# Altium PCB ECEN3730_brd_a_09-06-2023.PcbDoc
Units mil, origin at the board's own origin, x right, y up, seen from the top; angles counter-clockwise.
Board outline 3500 x 2000 mil, 2 copper layers (Top Layer, Bottom Layer), stack 61.756 mil thick; 23 components, 13 nets, 59 pads, 14 vias.
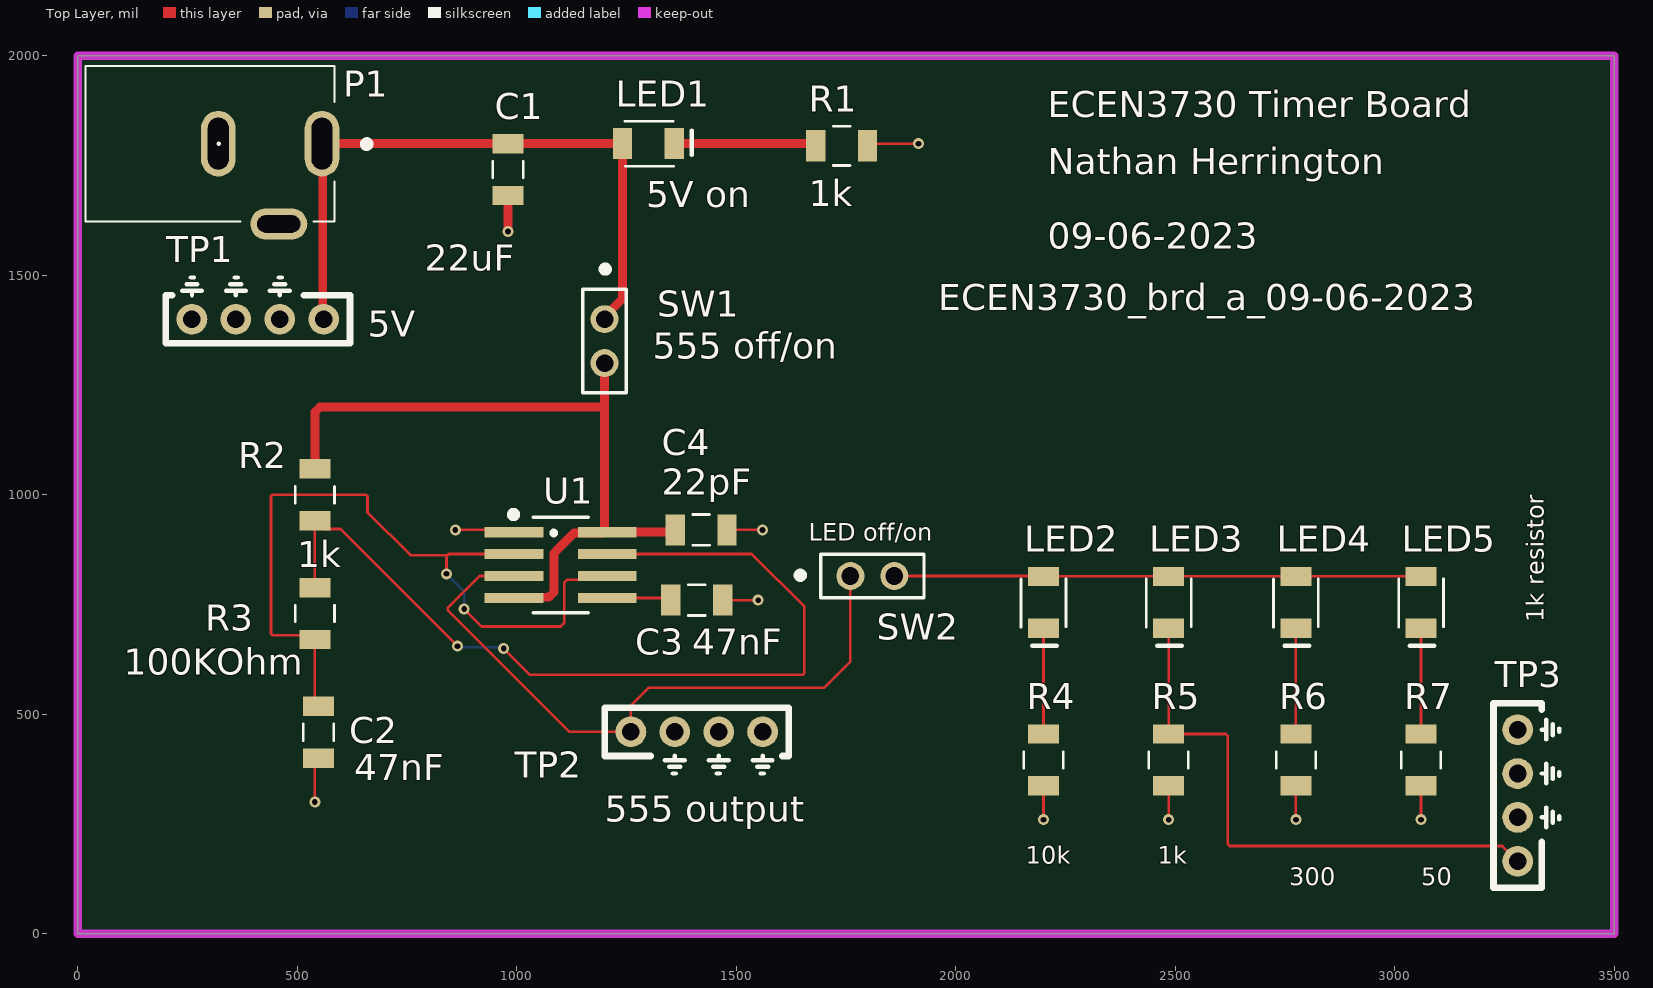
[diagram p0: Top Layer view]
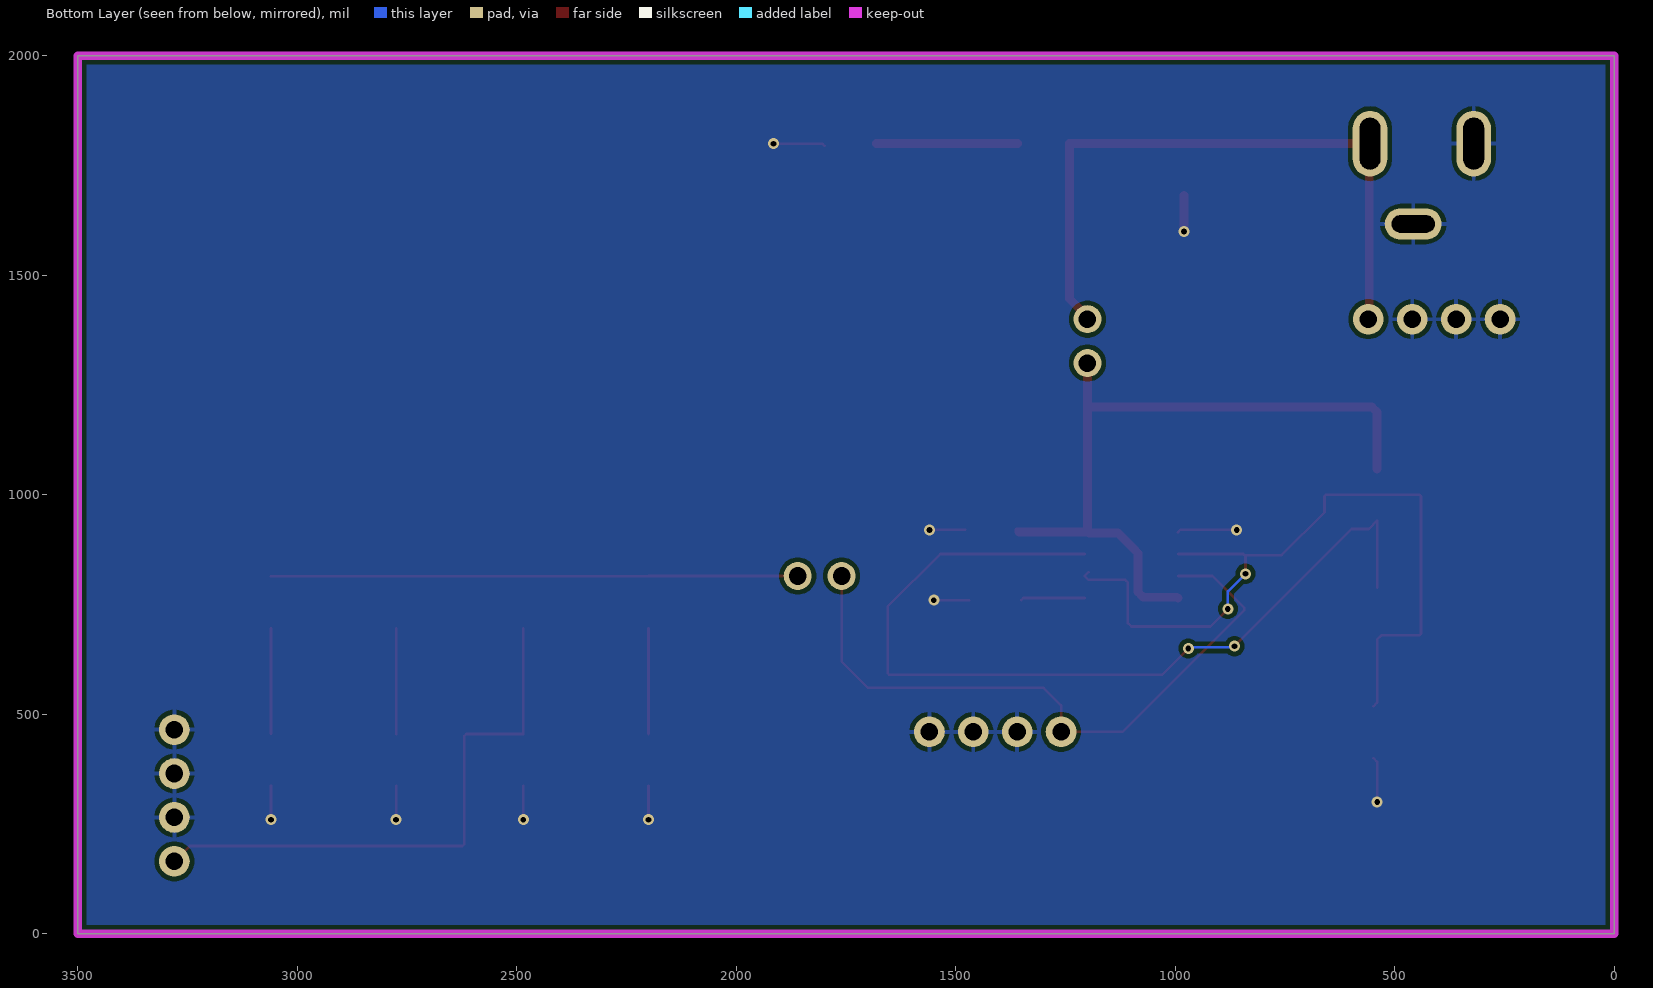
[diagram p1: Bottom Layer view, seen from below]
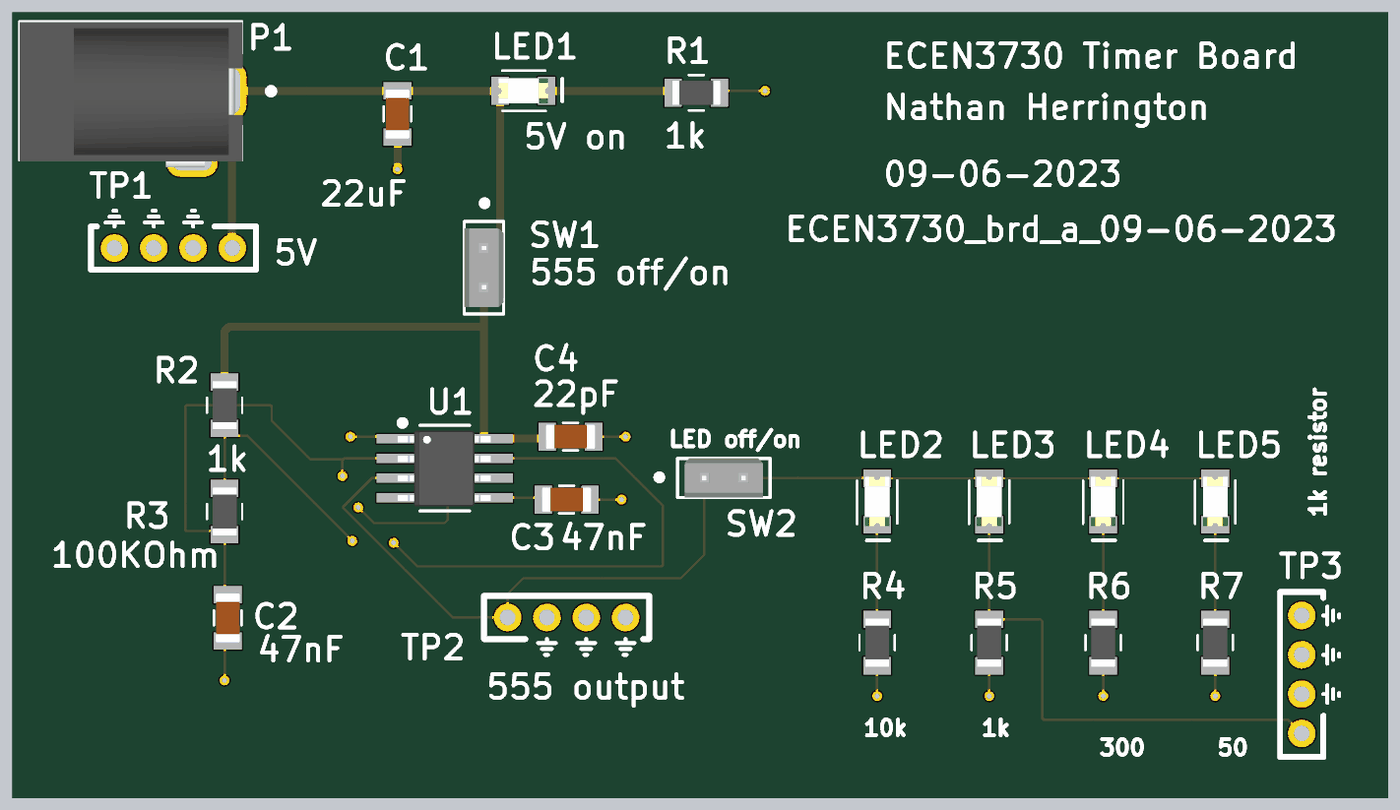
[diagram p2: 3D render of the assembled board from above, using the file's embedded part models]

## Layer stack, top to bottom
Top Solder: solder mask 1, SM-001, Dk 4
Top Layer: signal copper 1.378
Dielectric 1: core 59, Core-043, Dk 4.3
Bottom Layer: signal copper 1.378
Bottom Solder: solder mask 1, SM-001, Dk 4

## Board outline
0,0 3500,0 3500,2000 0,2000

## Design rules (kind name [scope] priority, off if disabled: settings)
BoardOutlineClearance [All] p1: gap=10 ignorepadtopadclearanceinfootprint=FALSE except(0: Arc-SplitContinuation Track-SplitContinuation SMDPad-SplitContinuation THPad-SplitContinuation Via-SplitContinuation Fill-SplitContinuation Poly-SplitContinuation Region-SplitContinuation Text-SplitContinuation)
Clearance [All] p1: gap=10 ignorepadtopadclearanceinfootprint=FALSE except(0: Arc-Hole Track-Hole SMDPad-Hole THPad-Hole Via-Hole Fill-Hole Poly-Hole Region-Hole Text-Hole)
PlaneClearance [All] p1: clearance=10
PlaneConnect [All] p1: planeconnectstyle=Direct reliefexpansion=20 reliefentries=4 reliefconductorwidth=10 reliefairgap=10
PolygonConnect [All] p1: thpad.connectstyle=Relief thpad.reliefconductorwidth=10 thpad.reliefentries=4 thpad.polygonreliefangle="90 Angle" thpad.airgapwidth=10 smdpad.connectstyle=Direct smdpad.reliefconductorwidth=10 smdpad.reliefentries=4 smdpad.polygonreliefangle="90 Angle" smdpad.airgapwidth=10 via.connectstyle=Direct via.reliefconductorwidth=10 via.reliefentries=4 via.polygonreliefangle="90 Angle" via.airgapwidth=10
RoutingVias [All] p1: holewidth=13 width=25 viastyle="Through Hole" minholewidth=13 minwidth=25 maxholewidth=60 maxwidth=80
SolderMaskExpansion [All] p1: expansion=4 istentingtop=FALSE
UnRoutedNet [All] p1: checkbadconnections=TRUE
Width "Schematic Width Constraint_1" [InNet('+5')] p1: maxlimit=100 minlimit=10 preferedwidth=20 minimp=50.000000 maximp=50.000000 favimp=50.000000
Width "Schematic Width Constraint" [InNet('555_5V')] p2: maxlimit=100 minlimit=10 preferedwidth=20 minimp=50.000000 maximp=50.000000 favimp=50.000000
Width [All] p3: maxlimit=100 minlimit=6 preferedwidth=10 bottomlayer_prefwidth=6 minimp=50.000000 maximp=50.000000 favimp=50.000000
27 further rules are at their usual default settings.

## Components (designator, comment, footprint, x,y, rotation, side; value= is the part's Value field where it differs from the comment)
C1 "22uF" 1206_Passive_Capacitor 980,1741 r90 top
C2 "47nF" 1206_Passive_Capacitor 548.38,459 r90 top
C3 "47nF" 1206_Passive_Capacitor 1410,760 r180 top
C4 "22pF" 1206_Passive_Capacitor 1420,920 r180 top
LED1 "Green" LED_1206 1300,1800 r0 top
LED2 "Red" LED_1206 2200,755 r270 top
LED3 "Red" LED_1206 2485,755 r270 top
LED4 "Red" LED_1206 2775,755 r270 top
LED5 "Red" LED_1206 3060,755 r270 top
P1 "Power Jack" Power_Jack 556.22,1800 r180 top value="CONN PWR JACK 2X5.5MM SOLDER"
R1 "1k" 1206_Passive_Resitor 1740,1795 r180 top value="1K Ohm"
R2 "1k" 1206_Passive_Resitor 540,1000 r90 top value="1K Ohm"
R3 "100KOhm" 1206_Passive_Resitor 540,729.5 r90 top
R4 "10k" 1206_Passive_Resitor 2200,396 r90 top value=10KOhm
R5 "1k" 1206_Passive_Resitor 2485,396 r90 top value="1K Ohm"
R6 "300 Ohm" 1206_Passive_Resitor 2775,396 r90 top value=300Ohm
R7 "47 Ohms" 1206_Passive_Resitor 3060,396 r90 top value=47Ohm
SW1 "SW_2Pin_100mil_Switch" 2Pin-Header-Conn 1200,1400 r270 top
SW2 "SW_2Pin_100mil_Switch" 2Pin-Header-Conn 1760,815 r0 top
TP1 "TP_5V" TP10x_Probe 410,1400 r180 top
TP2 "TP_OUT" TP10x_Probe 1410,460 r0 top
TP3 "TP_LED" TP10x_Probe 3280,315 r90 top
U1 "NE555DR" TS555IDTTR 1100,840 r0 top

## Footprints (in the part's own frame and the unit in brackets; to place one, negate y for a bottom-side part, rotate by r counter-clockwise, add the part's x,y. Pads: shape width x height; smd on the part's side, far side on the other; paste and mask are expansions set on the pad)
2Pin-Header-Conn [mm]
  round 1.62 hole 1.02: 1(0,0) 2(2.54,0)
  silkscreen extent -3.03,-1.27 4.26,1.26, body extent -1.27,-1.27 3.81,1.27, height 8.13
1206_Passive_Capacitor [mil]
  rect 44x71 smd: 1(-59,0) 2(59,0)
  silkscreen extent -19,-35 19,35, body extent -63,-31 63,32, height 50
1206_Passive_Resitor [mil]
  rect 44x71 smd: 1(-59,0) 2(59,0)
  silkscreen extent -19,-45 19,45, body extent -61,-31 61,31, height 26
LED_1206 [mil]
  rect 44x71 smd: 1(-59,0) 2(59,0)
  silkscreen extent -54,-51 99,51, body extent -63,-31 63,31, height 28
Power_Jack [mm]
  oval 2x3.8 hole 1.2 slot 3 at 90 deg: 1(0,0) 2(6,0)
  oval 3.3x1.8 hole 1 slot 2.5 at 0 deg: 3(2.5,4.65)
  silkscreen extent -2.79,-4.5 13.68,4.5, body extent -0.76,-4.45 13.64,4.95, height 11.49
TP10x_Probe [mil] "Small Probs footprint"
  round 70 hole 40: 1(-150,0) 2(-50,0) 2(50,0) 2(150,0)
  silkscreen extent -210,-95 210,55
TS555IDTTR [mm] "IC OSC Single Timer 2.7MHz 8SOIC"
  rect 3.4x0.6 smd: 1(-2.7,1.905) 2(-2.7,0.635) 3(-2.7,-0.635) 4(-2.7,-1.905) 5(2.7,-1.905) 6(2.7,-0.635) 7(2.7,0.635) 8(2.7,1.905)
  silkscreen extent -2.85,-2.77 1.6,3.05, body extent -3.03,-2.48 2.96,2.43, height 1.75

## Part data
C1: library part C_22uF_1206, "22uF ±10% 25V X5R 1206 Multilayer Ceramic Capacitors MLCC - SMD/SMT RoHS", LCSC Part#=C12891, MFR Part #=CL31A226KAHNNNE, Datasheet=https://datasheet.lcsc.com/lcsc/1811031514_Samsung-Electro-Mechanics-CL31A226KAHNNNE_C12891.pdf, Type=basic
C2 C3: library part C_47nF_1206, "47nF ±5% 50V C0G 1206 Multilayer Ceramic Capacitors MLCC - SMD/SMT RoHS", LCSC Part#=C21812, MFR Part #=GRM31M5C1H473JA01L, Datasheet=https://datasheet.lcsc.com/lcsc/1810201313_Murata-Electronics-GRM31M5C1H473JA01L_C21812.pdf, Type=Extended
C4: library part C_22pF_1206, "22pF ±5% 1kV C0G 1206 Multilayer Ceramic Capacitors MLCC - SMD/SMT RoHS", LCSC Part#=C107174, MFR Part #=CC1206JKNPOCBN220, Datasheet=https://datasheet.lcsc.com/lcsc/1810241219_YAGEO-CC1206JKNPOCBN220_C107174.pdf, Type=Extended
LED1: library part LED_GREEN_1206, "Green 513~528nm 1206 Light Emitting Diodes (LED) RoHS", LCSC Part#=C434439, MFR Part #=SZYY1206G, Datasheet=https://datasheet.lcsc.com/lcsc/2006301532_Yongyu-Photoelectric-SZYY1206G_C434439.pdf, Type=Extended
LED2 LED3 LED4 LED5: library part LED_RED_1206, "Red 621~631nm 1206 Light Emitting Diodes (LED) RoHS", LCSC Part#=C93133, MFR Part #=15-21/R6C-FQ1R1B/2T, Datasheet=https://datasheet.lcsc.com/szlcsc/1811151241_Everlight-Elec-15-21-R6C-FQ1R1B-2T_C93133.pdf, Type=Extended
P1: library part "P_Power Jack", "Power Barrel Connector Jack 2.10mm ID (0.083\"), 5.50mm OD (0.217\") Through Hole, Right Angle", LCSC Part#=C136744, MFR Part #=PJ-102A, Digikey Link=https://www.digikey.com/product-detail/en/PJ-102A/CP-102A-ND/275425/?itemSeq=304982367, Type=Extended
R1 R2 R5: library part R_1K_1206, "CHIP RESISTOR - SURFACE MOUNT 1KOHMS ±1% 1/4W 1206 ROHS", LCSC Part#=C4410, MFR Part #=RNCP1206FTD1K00CT, Digikey Link=https://www.digikey.com/product-detail/en/RNCP1206FTD1K00/RNCP1206FTD1K00CT-ND/2240675/?itemSeq=304982373, Type=Basic
R3: library part R_100KOhm_1206, "100kΩ ±1% 0.25W ±100ppm/℃ 1206 Chip Resistor - Surface Mount RoHS", LCSC Part#=C17900, MFR Part #=1206W4F1003T5E, Datasheet=https://datasheet.lcsc.com/lcsc/1810301421_UNI-ROYAL-Uniroyal-Elec-1206W4F1003T5E_C17900.pdf, Type=Basic
R4: library part R_10KOhm_1206, "10 kOhms ±5% 0.25W, 1/4W Chip Resistor 1206 (3216 Metric) Automotive AEC-Q200 Thick Film", LCSC Part#=C17902, MFR Part #=RMCF1206FT10K0, Digikey Link=https://www.digikey.com/en/products/detail/stackpole-electronics-inc/RMCF1206FT10K0/1759669, Type=Basic
R6: library part R_300Ohm_1206, "CHIP RESISTOR - SURFACE MOUNT 300OHMS ±1% 1/4W 1206 ROHS", LCSC Part#=C17887, MFR Part #=1206W4F3000T5E, Datasheet=https://datasheet.lcsc.com/szlcsc/Uniroyal-Elec-1206W4F3000T5E_C17887.pdf, Type=Basic
R7: library part R_47Ohm_1206, "47Ω ±5% 0.25W ±200ppm/℃ 1206 Chip Resistor - Surface Mount RoHS", LCSC Part#=C25384, MFR Part #=1206W4J0470T5E, Datasheet=https://datasheet.lcsc.com/lcsc/1811101020_UNI-ROYAL-Uniroyal-Elec-1206W4J0470T5E_C25384.pdf, Type=Extended
SW1 SW2: "2Pin Header", LCSC Part#=C124375, Type=Extended
TP1 TP2 TP3: library part TP_10x_Probe, "Test Point 300 mil centers"
U1: library part U_555_Slow, "555 Timer SOIC-8_150MIL ROHS 150ns Rise Time", LCSC Part#=C7593, Digikey Link=https://www.digikey.com/product-detail/en/texas-instruments/NE555DR/296-6501-1-ND/372490, MFR Part #=NE555DR, Type=Basic

## Via types
v1: diameter 25, hole 13, Top Layer to Bottom Layer, 14 vias

## Nets (pads, with @x,y where several pads share a name; then routed paths per layer and width w, separated by ;. In a path a pad name is that pad's centre, name@x,y a point inside that pad or via, vN(x,y) a via of type N, cw(c..) or ccw(c..) an arc to the next point about the centre after c; other vN are vias at no path point)
555_5V: C4.2 R2.2 SW1.2 U1.4 U1.8 | length 1655.1
  Top Layer w10: C4.2@1356,915 C4.2
  Top Layer w20: R2.2 540,1188.28 551.72,1200 1200,1200 ; U1.4 995.51,766.81 1073.05,766.81 1084.77,778.53 1084.77,866.95 1093.59,875.78 1131,913.19 1196.38,913.19 1200,916.81 1200,1200 ; SW1.2 1200,1200 ; U1.8 C4.2@1356,915
+5: C1.2 LED1.1 P1.1 SW1.1 TP1.1 | length 1503.3
  Top Layer w20: TP1.1 558.11,1401.89 558.11,1798.11 P1.1 C1.2 LED1.1 1241,1446.53 1200,1405.53 SW1.1
GND: C1.1 C2.1 C3.1 C4.1 P1.2 P1.3 R1.1 R4.1 R5.1 R6.1 R7.1 TP1.2 TP2.2 TP3.2 U1.1 | length 909.3
  Top Layer w6: v1(540,300) 540,391.62 C2.1 ; v1(860,920) 988.7,920 U1.1 ; C3.1 v1(1550,760) ; C4.1 v1(1560,920) ; R1.1 1804,1800 v1(1915,1800) ; v1(2200,260) R4.1 ; v1(2485,260) R5.1 ; v1(2775,260) R6.1 ; v1(3060,260) R7.1
  Top Layer w20: v1(980,1600) C1.1
NetC2_2: C2.2 R3.1 U1.2 U1.6 | length 1805.9
  Top Layer w6: C2.2 540,526.38 R3.1 530.5,680 443.51,680 440,683.51 440,996.49 443.51,1000 656.49,1000 660,996.49 660,960 757.5,862.5 842.5,862.5 ; v1(840,820) 840,860 842.5,862.5 ; v1(880,740) 920,700 1100,700 1107.77,707.77 1107.77,800 1113.95,806.19 1197.49,806.19 U1.6 U1.6@1197.49,823.81 ; U1.2 845,865 842.5,862.5
  Bottom Layer w6: v1(840,820) 880,780 v1(880,740)
NetC3_2: C3.2 U1.5 | length 146.8
  Top Layer w6: U1.5 1346,765 C3.2
NetLED1_2: LED1.2 R1.2 | length 322
  Top Layer w20: LED1.2 R1.2@1681,1800
NetLED2_1: LED2.1 LED3.1 LED4.1 LED5.1 SW2.2 | length 1200.4
  Top Layer w6: SW2.2 2199,815 LED2.1 LED3.1 LED4.1 LED5.1
NetLED2_2: LED2.2 R4.2 | length 241
  Top Layer w6: R4.2 LED2.2
NetLED3_2: LED3.2 R5.2 TP3.1 | length 1300.5
  Top Layer w6: LED3.2 R5.2 2615,455 2620,450 2620,203.51 2623.51,200 3245,200 TP3.1
NetLED4_2: LED4.2 R6.2 | length 241
  Top Layer w6: R6.2 LED4.2
NetLED5_2: LED5.2 R7.2 | length 241
  Top Layer w6: R7.2 LED5.2
NetR2_1: R2.1 R3.2 U1.7 | length 2064.2
  Top Layer w6: R3.2 R2.1 559,922 598,922 v1(865,655) ; v1(970,650) 1030,590 1651.49,590 1655,593.51 1655,745 1535,865 U1.7
  Bottom Layer w6: v1(865,655) 867.5,652.5 967.5,652.5 v1(970,650)
NetSW2_1: SW2.1 TP2.1 U1.3 | length 1515.1
  Top Layer w6: U1.3 915,815 842.49,742.49 842.49,737.51 1120,460 TP2.1 1260,520 1300,560 1700,560 1760,620 SW2.1

## Polygon pours and split planes (outlines as drawn)
GND on Bottom Layer "GND_L02_P000" (solid, pour order 0): 0,2000 3500,2000 3500,0 0,0

## Keep-outs
Keep-Out Layer:
  the board outline again, w20

## Silkscreen, mask and mechanical layers (free items; w line width, h text height)
Top Overlay:
  text "ECEN3730 Timer Board" at 2210,1860 h60
  text "Nathan Herrington" at 2210,1729.99 h60
  text "5V on" at 1295,1655 h60
  text "09-06-2023" at 2210,1560 h60
  text "ECEN3730_brd_a_09-06-2023" at 1960,1420 h60
  text "5V" at 660,1360 h60
  text "555 off/on" at 1310,1310 h60
  text "LED off/on" at 1665,895 h40
  text "1k resistor" at 3340,710 h40 r90
  text "555 output" at 1200,254.99 h60
  text "10k" at 2160,160 h40
  text "1k" at 2460,160 h40
  text "300" at 2760,110 h40
  text "50" at 3060,110 h40